# EAGLE board flight-controller (EAGLE 7.4.0)
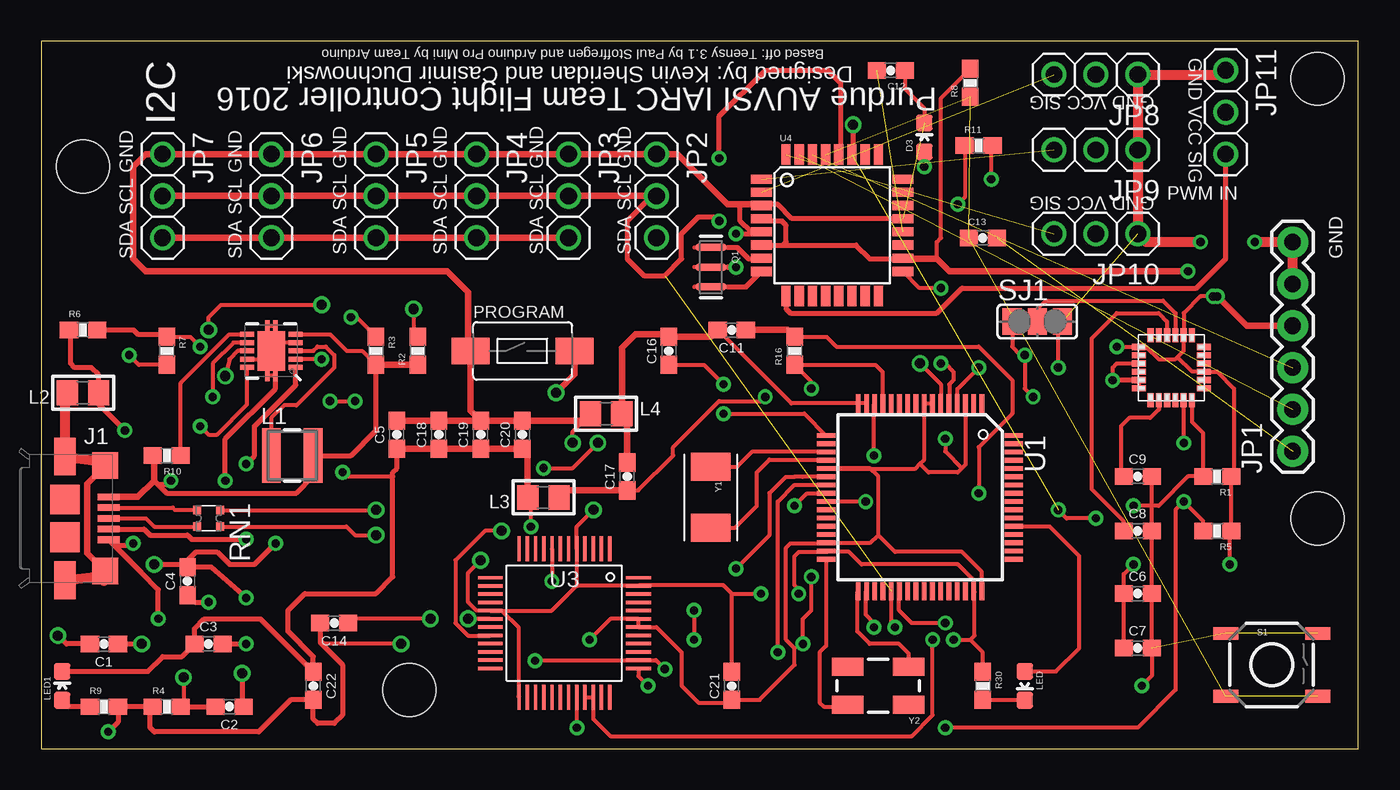
[diagram p0: board, top side]
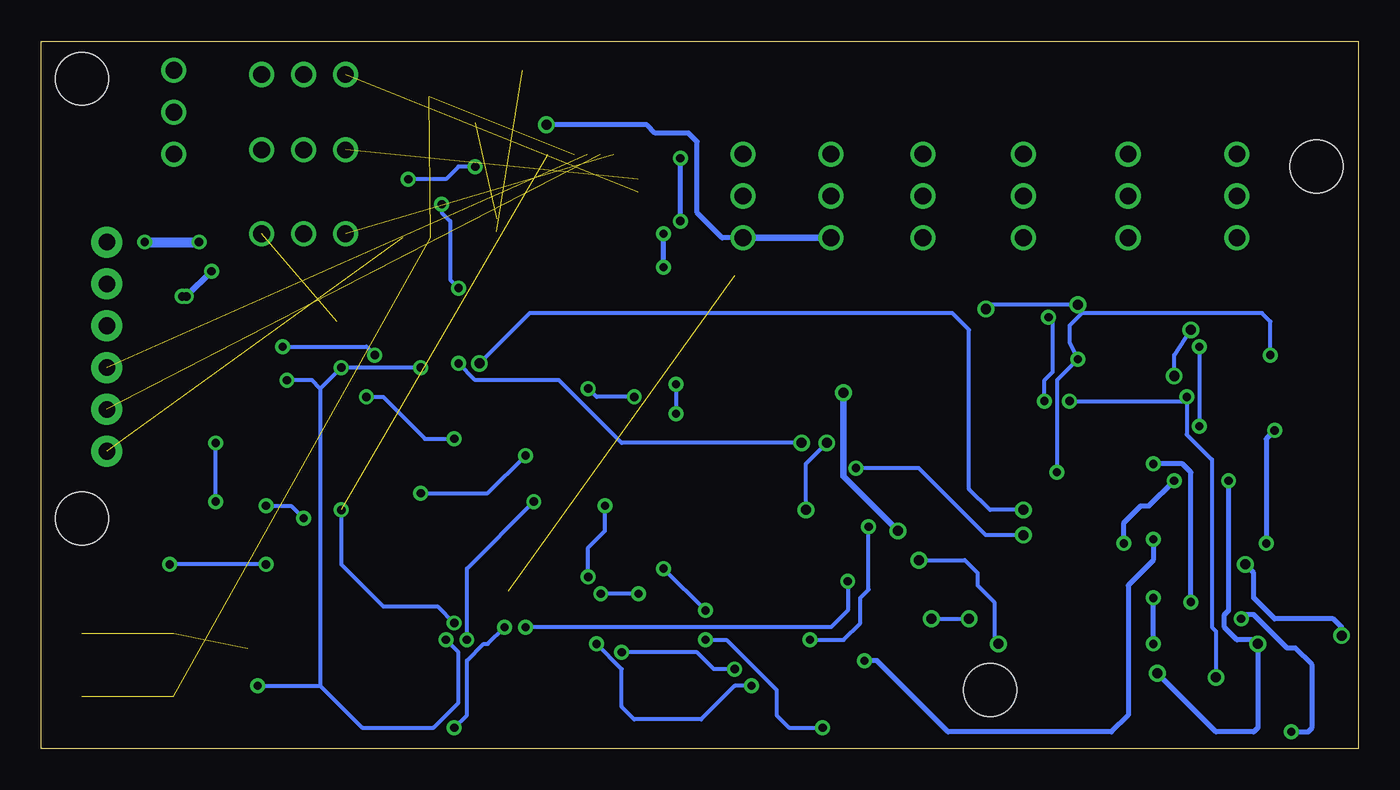
[diagram p1: board, bottom side, seen from below]

Size 79.93 x 42.92 mm. Coordinates in mm from the lower left corner, seen from the top.
Outline: 0,0 79.93,0 79.93,42.92 0,42.92 0,0
Copper layers (1*16): Top 0.035mm / dielectric 1.5mm / Bottom 0.035mm
Design rules "default": minimum track width 10mil, minimum drill 24mil, track to track 8mil, track to pad 8mil, pad to pad 8mil, via to via 8mil, smd to smd 8mil, copper to edge 40mil, drill to drill 8mil, minimum pad ring 10mil, minimum via ring 8mil, stop-mask expansion 4mil, vias tented up to drill 0mil, thermal gap 10mil
Net classes: 1 USB: width 0.254 mm, drill 0.33 mm, clearance 0.159 mm; 2 Top GND Pour: clearance 0.762 mm to class 1
Holes 3.2 mm at 2.54,35.31 77.47,40.64 77.47,13.97 22.35,3.56

## Footprints (pad centres in the part's own frame; a part is rotated, then mirrored left to right if it is on the bottom)
0603-CAP = smd 1.1 x 1: 1 -0.85,0; 2 0.85,0
0603-LED-ALT1 = smd 1 x 1: A 0,-0.877; C 0,0.877
1981584-1 = smd 0.4 x 1.35: 1 -1.3,4.1; 2 -0.65,4.1; 3 0,4.1; 4 0.65,4.1; 5 1.3,4.1 | smd 1.8 x 1.8: M1 -1.15,1.45; M2 1.15,1.45 | smd 2.3 x 1.3: S1 -3.75,1.45; S2 3.75,1.45 | smd 1.6 x 1.6: S3 -3.2,3.885; S4 3.2,3.885
1X06 = drill 1.016 pad 1.88: 1 0,0; 2 2.54,0; 3 5.08,0; 4 7.62,0; 5 10.16,0; 6 12.7,0
1X03 = drill 1.016: 1 -2.54,0; 2 0,0; 3 2.54,0
LPS3015 = smd 1.14 x 3.3: 1 -1.27,0; 2 1.27,0
0805 = smd 1.3 x 1.5: 1 -0.95,0; 2 0.95,0
LED-0603 = smd 1 x 1: A 0,-0.877; C 0,0.877
TACTILE-SWITCH-1101NE = smd 2.3 x 1.6: P$1 -3.15,0; P$2 3.15,0
RESONATOR-SMD-1:1 = smd 0.45 x 1.905: 1 -1.2,0; 2 0,0; 3 1.2,0
0603-RES = smd 1.1 x 1: 1 -0.85,0; 2 0.85,0
EXB34V = smd 0.5 x 0.5: 1 -0.5,-0.7; 2 0.5,-0.7; 3 0.5,0.7; 4 -0.5,0.7
TACTILE-SWITCH-SMD-ALT01 = smd 1.524 x 0.762: 1 -2.794,1.905; 2 2.794,1.905; 3 -2.794,-1.905; 4 2.794,-1.905
SJ_2 = smd 1.168 x 1.6: 1 -1.524,0; 2 0,0; 3 1.524,0
MK20DX256VLH7 = smd 1.1 x 0.285: 1 -5.7,3.75; 2 -5.7,3.25; 3 -5.7,2.75; 4 -5.7,2.25; 5 -5.7,1.75; 6 -5.7,1.25; 7 -5.7,0.75; 8 -5.7,0.25; 9 -5.7,-0.25; 10 -5.7,-0.75; 11 -5.7,-1.25; 12 -5.7,-1.75; 13 -5.7,-2.25; 14 -5.7,-2.75; 15 -5.7,-3.25; 16 -5.7,-3.75; 33 5.7,-3.75; 34 5.7,-3.25; 35 5.7,-2.75; 36 5.7,-2.25; 37 5.7,-1.75; 38 5.7,-1.25; 39 5.7,-0.75; 40 5.7,-0.25; 41 5.7,0.25; 42 5.7,0.75; 43 5.7,1.25; 44 5.7,1.75; 45 5.7,2.25; 46 5.7,2.75; 47 5.7,3.25; 48 5.7,3.75 | smd 0.285 x 1.1: 17 -3.75,-5.7; 18 -3.25,-5.7; 19 -2.75,-5.7; 20 -2.25,-5.7; 21 -1.75,-5.7; 22 -1.25,-5.7; 23 -0.75,-5.7; 24 -0.25,-5.7; 25 0.25,-5.7; 26 0.75,-5.7; 27 1.25,-5.7; 28 1.75,-5.7; 29 2.25,-5.7; 30 2.75,-5.7; 31 3.25,-5.7; 32 3.75,-5.7; 49 3.75,5.7; 50 3.25,5.7; 51 2.75,5.7; 52 2.25,5.7; 53 1.75,5.7; 54 1.25,5.7; 55 0.75,5.7; 56 0.25,5.7; 57 -0.25,5.7; 58 -0.75,5.7; 59 -1.25,5.7; 60 -1.75,5.7; 61 -2.25,5.7; 62 -2.75,5.7; 63 -3.25,5.7; 64 -3.75,5.7
QFN-10_PAD = smd 0.297 x 0.85: 1 -1,-1.475; 2 -0.5,-1.475; 3 0,-1.475; 4 0.5,-1.475; 5 1,-1.475; 6 1,1.475; 7 0.5,1.475; 8 0,1.475; 9 -0.5,1.475; 10 -1,1.475 | smd 0.7 x 0.28: 11 -1.5,0.25; 12 -1.5,-0.25; 13 1.5,0.25; 14 1.5,-0.25 | smd 2.4 x 1.65: 15 0,0
MINI54TAN = smd 0.203 x 1.5: 1 -2.75,-4.5; 2 -2.25,-4.5; 3 -1.75,-4.5; 4 -1.25,-4.5; 5 -0.75,-4.5; 6 -0.25,-4.5; 7 0.25,-4.5; 8 0.75,-4.5; 9 1.25,-4.5; 10 1.75,-4.5; 11 2.25,-4.5; 12 2.75,-4.5; 25 2.75,4.5; 26 2.25,4.5; 27 1.75,4.5; 28 1.25,4.5; 29 0.75,4.5; 30 0.25,4.5; 31 -0.25,4.5; 32 -0.75,4.5; 33 -1.25,4.5; 34 -1.75,4.5; 35 -2.25,4.5; 36 -2.75,4.5 | smd 1.5 x 0.203: 13 4.5,-2.75; 14 4.5,-2.25; 15 4.5,-1.75; 16 4.5,-1.25; 17 4.5,-0.75; 18 4.5,-0.25; 19 4.5,0.25; 20 4.5,0.75; 21 4.5,1.25; 22 4.5,1.75; 23 4.5,2.25; 24 4.5,2.75; 37 -4.5,2.75; 38 -4.5,2.25; 39 -4.5,1.75; 40 -4.5,1.25; 41 -4.5,0.75; 42 -4.5,0.25; 43 -4.5,-0.25; 44 -4.5,-0.75; 45 -4.5,-1.25; 46 -4.5,-1.75; 47 -4.5,-2.25; 48 -4.5,-2.75
TQFP32-08 = smd 1.27 x 0.559: 1 -4.293,2.8; 2 -4.293,2; 3 -4.293,1.2; 4 -4.293,0.4; 5 -4.293,-0.4; 6 -4.293,-1.2; 7 -4.293,-2; 8 -4.293,-2.8; 17 4.293,-2.8; 18 4.293,-2; 19 4.293,-1.2; 20 4.293,-0.4; 21 4.293,0.4; 22 4.293,1.2; 23 4.293,2; 24 4.293,2.8 | smd 0.559 x 1.27: 9 -2.8,-4.293; 10 -2,-4.293; 11 -1.2,-4.293; 12 -0.4,-4.293; 13 0.4,-4.293; 14 1.2,-4.293; 15 2,-4.293; 16 2.8,-4.293; 25 2.8,4.293; 26 2,4.293; 27 1.2,4.293; 28 0.4,4.293; 29 -0.4,4.293; 30 -1.2,4.293; 31 -2,4.293; 32 -2.8,4.293
QFN.24.4X4 = smd 0.85 x 0.38: 1 -1.975,1.25; 2 -1.975,0.75; 3 -1.975,0.25; 4 -1.975,-0.25; 5 -1.975,-0.75; 6 -1.975,-1.25; 13 1.975,-1.25; 14 1.975,-0.75; 15 1.975,-0.25; 16 1.975,0.25; 17 1.975,0.75; 18 1.975,1.25 | smd 0.38 x 0.85: 7 -1.25,-1.975; 8 -0.75,-1.975; 9 -0.25,-1.975; 10 0.25,-1.975; 11 0.75,-1.975; 12 1.25,-1.975; 19 1.25,1.975; 20 0.75,1.975; 21 0.25,1.975; 22 -0.25,1.975; 23 -0.75,1.975; 24 -1.25,1.975
CRYSTAL-TXC-7A = smd 1.7 x 2.4: P$1 1.85,0; P$2 -1.85,0
CRYSTAL-SMD-5X3 = smd 1.9 x 1.1: 1 -1.85,-1.15; 2 1.85,-1.15; 3 1.85,1.15; 4 -1.85,1.15

## Placement (x,y rotation side)
C1  10uF  [0603-CAP]  3.81,6.35 180 top
C2  0.1uF  [0603-CAP]  11.43,2.54 180 top
C3  22uF  [0603-CAP]  10.16,6.35 0 top
C4  0.1uF  [0603-CAP]  8.89,10.16 90 top
C5  0.1uF  [0603-CAP]  21.59,19.05 90 top
C6  0.1uF  [0603-CAP]  66.55,9.4 0 top
C7  10nF  [0603-CAP]  66.55,6.1 0 top
C8  0.1uF  [0603-CAP]  66.55,13.21 0 top
C9  2.2nF  [0603-CAP]  66.55,16.51 0 top
C11  0.1uF  [0603-CAP]  41.91,25.4 180 top
C12  0.1uF  [0603-CAP]  51.56,41.15 180 top
C13  0.1uF  [0603-CAP]  57.15,30.99 0 top
C14  0.1uF  [0603-CAP]  17.78,7.62 180 top
C16  0.1uF  [0603-CAP]  38.1,24.13 90 top
C17  2.2uF  [0603-CAP]  35.56,16.51 90 top
C18  0.1uF  [0603-CAP]  24.13,19.05 90 top
C19  0.1uF  [0603-CAP]  26.67,19.05 90 top
C20  2.2uF  [0603-CAP]  29.21,19.05 90 top
C21  0.1uF  [0603-CAP]  41.91,3.81 90 top
C22  0.1uF  [0603-CAP]  16.51,3.81 270 top
D3  Green  [0603-LED-ALT1]  53.59,37.08 0 top
J1  1981584-1  [1981584-1]  0,13.97 270 top
JP1  FTDI Basic  [1X06]  75.95,18.03 90 top
JP2  [1X03]  37.34,33.53 270 top
JP3  [1X03]  32,33.53 270 top
JP4  [1X03]  26.42,33.53 270 top
JP5  [1X03]  20.32,33.53 270 top
JP6  [1X03]  13.97,33.53 270 top
JP7  [1X03]  7.37,33.53 270 top
JP8  [1X03]  64.01,40.89 180 top
JP9  [1X03]  64.01,36.32 180 top
JP10  [1X03]  64.01,31.24 180 top
JP11  [1X03]  71.88,38.61 270 top
L1  2.2uH, 2.1A  [LPS3015]  15.24,17.78 0 top
L2  600 Ohm/100 Mhz  [0805]  2.54,21.59 180 top
L3  600 Ohm/100 Mhz  [0805]  30.48,15.24 180 top
L4  600 Ohm/100 Mhz  [0805]  34.29,20.32 0 top
LED  AMBER/ 592 nm  [LED-0603]  59.69,3.81 180 top
LED1  [LED-0603]  1.27,3.81 0 top
PROGRAM  Program  [TACTILE-SWITCH-1101NE]  29.21,24.13 0 top
Q1  8/16/20MHz  [RESONATOR-SMD-1:1]  40.64,29.21 270 top
R1  10K  [0603-RES]  71.37,16.51 180 top
R2  10K  [0603-RES]  22.86,24.13 90 top
R3  2M  [0603-RES]  20.32,24.13 270 top
R4  220K  [0603-RES]  7.62,2.54 0 top
R5  10K  [0603-RES]  71.37,13.21 180 top
R6  220K  [0603-RES]  2.54,25.4 0 top
R7  1.2M  [0603-RES]  7.62,24.13 270 top
R8  10K  [0603-RES]  56.39,40.39 90 top
R9  470  [0603-RES]  3.81,2.54 0 top
R10  1K  [0603-RES]  7.62,17.78 180 top
R11  330  [0603-RES]  56.9,36.58 0 top
R16  470  [0603-RES]  45.72,24.13 90 top
R30  470  [0603-RES]  57.15,3.81 270 top
RN1  33  [EXB34V]  10.16,13.97 270 top
S1  Reset  [TACTILE-SWITCH-SMD-ALT01]  74.68,5.08 0 top
SJ1  [SJ_2]  60.45,25.91 0 top
U1  MK20DX256VLH7  [MK20DX256VLH7]  53.34,15.24 270 top
U2  TPS61200  [QFN-10_PAD]  13.97,24.13 90 top
U3  MINI54TAN  [MINI54TAN]  31.75,7.62 180 top
U4  ATMEGA328  [TQFP32-08]  48.01,31.75 0 top
U$1  MPU-9150.QFN  [QFN.24.4X4]  68.58,23.11 180 top
Y1  32.768KHz  [CRYSTAL-TXC-7A]  40.64,15.24 270 top
Y2  16Mhz/8pF  [CRYSTAL-SMD-5X3]  50.8,3.81 180 top

## Library data of the parts
C1 = appfruits; MF: Murata; MPN: GRM188R60J106ME47D
C2 C4-C9 C11 C14 C16 C18 C19 C21 C22 = appfruits; MF: Kemet; MPN: C0603C104J3RACTU
C3 = appfruits; MF: Murata; MPN: GRM188R60J226MEA0D
C12 C13 JP1 R8 R11 U4 = SparkFun
C17 C20 = appfruits; MF: Kemet; MPN: C0603C225K4PACTU
D3 Q1 S1 = Testing
J1 = con-usb; MF: Hirose; MPN: ZX62-AB-5PA(11)
JP2-JP11 = adafruit
L1 = appfruits; MF: Coilcraft; MPN: LPS3015-222MRB
L2-L4 = appfruits; MF: Taiyo Yuden; MPN: BK2125HM601-T
LED = appfruits; MF: Avago Technologies; MPN: HSMA-C190
LED1 = appfruits; MF: Avago; MPN: HSMG-C190
PROGRAM = SparkFun-Electromechanical; MF: C&K Components; MPN: RS-282G05A3-SM RT
R1 R2 R5 = appfruits; MF: Panasonic; MPN: ERJ-3GEYJ103V
R3 = appfruits; MF: Panasonic; MPN: ERJ-3GEYJ205V
R4 R6 = appfruits; MF: Panasonic; MPN: ERJ-3GEYJ224V
R7 = appfruits; MF: Panasonic; MPN: ERJ-3GEYJ125V
R9 R16 R30 = appfruits; MF: Panasonic; MPN: ERJ-3GEYJ471V
R10 = appfruits; MF: Panasonic; MPN: ERJ-3GEYJ102V
RN1 = resistor-dil; MF: Panasonic; MPN: EXB-34V330JV; OC_FARNELL: unknown; OC_NEWARK: unknown
SJ1 = jumper
U1 = appfruits; MF: Freescale; MPN: MK20DX256VLH7
U2 = appfruits; MF: Texas Instruments; MPN: TPS61200DRCR; PROD_ID: IC-10035
U3 = TeensyCustom
U$1 = invensense
Y1 = appfruits; MF: Epson Timing; MPN: FC-255 32.7680K-A3
Y2 = appfruits; MF: ECS; MPN: ECS-160-8-30B-CKM

## Nets
3.3V: C3.1 C5.1 C6.1 C7.1 C18.1 C19.1 C20.1 C21.1 C22.1 JP1.4 L3.2 LED1.C R1.1 R5.1 R7.2 R8.2 SJ1.1 U1.3 U1.7 U1.8 U1.21 U1.30 U1.48 U2.2 U3.42 U3.43 U4.4 U4.6 U4.18 U$1.3 U$1.8 U$1.13
AREF: C12.2 U4.20
DTR: C13.2 JP1.1
FB: R6.2 R7.1 U2.10
GND [Top GND Pour]: C5.2 C6.2 C7.2 C8.2 C9.2 C12.1 C14.2 C18.2 C19.2 C20.2 C21.2 C22.2 D3.C J1.5 JP1.5 JP1.6 JP2.1 JP3.1 JP4.1 JP5.1 JP6.1 JP7.1 JP8.1 JP9.1 JP10.1 JP11.1 L2.1 L4.1 PROGRAM.P$1 Q1.2 R4.1 R6.1 R9.2 R30.1 S1.1 S1.2 SJ1.3 U1.4 U1.31 U1.47 U3.5 U3.17 U3.25 U3.47 U4.3 U4.5 U4.21 U$1.15 U$1.17 U$1.18
ID: J1.4 U1.23 U3.38
MISO: U1.52
MOSI: U1.51
N$1: LED1.A R9.1
N$2: L1.1 U2.3
N$3: C9.1 U$1.20
N$4: C8.1 U$1.10
N$5: SJ1.2 U$1.9
N$6: Q1.3 U4.8
N$7: D3.A R11.2
N$8: Q1.1 U4.7
N$9: JP1.3 U4.30
N$10: JP1.2 U4.31
N$11: JP10.3 U4.32
N$12: LED.A U1.53
N$13: JP9.3 U4.1
N$14: JP8.3 U4.2
N$15: U1.24 U3.37
N$16: JP11.3 U4.9
N$18: LED.C R30.2
N$19: PROGRAM.P$2 U3.20
N$22: C14.1 U3.18
N$27: U1.32 Y2.3
N$28: U1.33 Y2.1
N$29: U1.19 Y1.P$2
N$30: U1.20 Y1.P$1
NONE: R11.1 U4.17
PGND: C1.2 C3.2 C4.2 U2.4 U2.9 U2.11 U2.12 U2.13 U2.14 U2.15
PS: R2.2 U2.8
RESET: C13.1 R8.1 S1.3 S1.4 U4.29
RESET_B: U1.34 U3.8
SCK: U1.50
SCL: JP2.2 JP3.2 JP4.2 JP5.2 JP6.2 JP7.2 R5.2 U1.37 U4.28 U$1.23
SDA: JP2.3 JP3.3 JP4.3 JP5.3 JP6.3 JP7.3 R1.2 U1.38 U4.27 U$1.24
SOFTPOWER: R10.1 U2.6
SWD_CLK: U1.22 U3.32
SWD_DIO: U1.25 U3.33 U3.34
USB_CON_N [USB]: J1.2 RN1.1
USB_CON_P [USB]: J1.3 RN1.2
USB_D_N [USB]: RN1.4 U1.6
USB_D_P [USB]: RN1.3 U1.5
USB_SHIELD: J1.S1 J1.S2 J1.S3 J1.S4 L2.2
UVLO: C2.2 R3.1 R4.2 U2.7
VAUX: C4.1 U2.1
VCC: C1.1 C2.1 J1.1 L1.2 R2.1 R3.2 R10.2 U2.5
VDDA: C17.1 L3.1 R16.1 U1.13
VREF_OUT: C16.1 U1.17
VREFH: C11.1 R16.2 U1.14
VREFL: C11.2 C16.2 C17.2 L4.2 U1.15 U1.16

## Tracks (layer width: path | path; a pad name or v marks a point on that pad's centre or on a via)
3.3V  (via drill 0.5)
  Top 0.254: R7.2 5.93,23.28 v5.33,23.88 | v17.02,23.62 U2.2 | v18.29,16.76 18.54,16.51 21.34,16.51 | v33.27,6.6 34.54,7.87 U3.43 U3.42 37.33,7.37 38.86,5.84 38.86,3.81 39.88,2.79 41.74,2.79 C21.1 43.6,2.96 45.72,5.08 45.72,6.1 45.21,6.6 45.21,12.19 45.47,12.45 47.6,12.45 U1.30 50.34,12.49 50.8,12.95 | v29.72,13.46 29.72,15.05 L3.2 | 50.8,12.95 50.8,16.51 50.29,17.02 47.67,17.02 U1.21 53.06,16.99 53.34,17.27 | 53.34,17.27 53.59,17.53 U1.8 U1.7 | U1.3 56.09,17.23 55.88,17.02 | 55.88,17.02 55.63,16.76 53.85,16.76 53.34,17.27 | U1.48 57.09,10.73 55.88,11.94 51.82,11.94 50.8,12.95 | C7.1 C6.1 65.7,10.58 v66.29,11.18 | v72.14,11.18 72.14,13.12 R5.1 R1.1 72.39,16.68 72.39,21.84 71.37,22.86 U$1.3 69.85,22.86 68.96,23.75 | 68.96,23.75 68.83,23.62 67.82,23.62 67.08,24.36 U$1.13 65.3,24.36 v65.28,24.38 | 68.96,23.75 69.34,24.13 69.34,25.08 U$1.8 69.34,25.1 69.34,26.42 70.36,27.43 v71.12,27.43 | v59.69,23.88 59.44,23.88 | 59.44,23.88 58.93,24.38 SJ1.1 | 59.44,23.88 59.69,23.62 v59.69,23.88 | v59.69,23.88 59.69,21.84 v60.2,21.34 | v54.86,18.8 54.86,18.03 55.88,17.02 | 54.36,29.72 54.36,30.73 54.61,30.99 54.61,39.46 R8.2
  Top 0.305: LED1.C 6.46,4.69 7.37,5.59 8.55,5.59 C3.1 9.31,7.28 9.91,7.87 13.3,7.87 C22.1 16.51,5.59 14.99,7.11 14.99,8.38 16,9.4 20.32,9.4 21.34,10.41 21.34,16.51 21.34,16.76 21.59,17.02 C5.1 | U4.4 43.86,32 44.96,32 45.21,31.75 45.21,30.73 45.03,30.55 U4.6 49.46,30.55 50.29,29.72 52.27,29.72 U4.18
  Top 0.406: C5.1 C18.1 C19.1 C20.1 29.53,17.88 L3.2 | JP1.4 73.15,25.65 v71.37,27.43 | v69.6,28.96 55.12,28.96 54.36,29.72 52.33,29.72 U4.18
  Bottom 0.254: v5.33,23.88 5.33,25.91 5.84,26.42 16.76,26.42 17.53,25.65 17.53,24.64 v17.02,23.62 18.29,22.35 v18.29,16.76 | v33.27,6.6 31.24,6.6 30.23,7.62 30.23,9.14 29.72,9.65 v29.72,13.46 | v66.29,11.18 v72.14,11.18 | v65.28,24.38 60.2,24.38 v59.69,23.88 | v60.2,21.34 59.18,21.34 56.64,18.8 v54.86,18.8
  Bottom 0.406: v71.37,27.43 v71.12,27.43 v69.6,28.96
AREF  (1 unrouted)
DTR  (1 unrouted)
FB  (via drill 0.5)
  Top 0.254: R7.1 9.06,24.98 v9.65,24.38 | 12.48,23.11 U2.10 12.49,20.88 10.67,19.05 10.16,19.05 v9.65,19.56
  Top 0.305: R6.2 5.59,25.4 5.84,25.15 7.45,25.15 R7.1
  Bottom 0.254: v9.65,24.38 v9.65,19.56
GND  (via drill 0.5, 0.61)  (4 unrouted)
  Top 0.254: U3.17 30.98,8.37 32.51,9.91 | 32.51,9.91 32.51,12.11 U3.5 32.5,13.45 v33.53,14.48 | U3.17 27.95,8.37 28.96,7.37 28.96,3.16 U3.25 | U3.17 26.43,8.37 25.91,8.89 25.91,10.67 v26.67,11.43 | v21.84,6.35 17.18,6.35 16.93,6.6 | v32.26,18.54 32.26,19.24 L4.1 | 32.51,9.91 32.55,9.87 U3.47 36.29,9.91 41.4,9.91 41.91,9.4 | C21.2 41.91,9.4 | 41.91,9.4 v43.69,9.4 | v45.97,9.4 45.97,9.65 45.72,9.91 45.72,11.68 45.97,11.94 47.59,11.94 U1.31 47.69,11.94 49.02,11.94 49.78,11.18 55.63,11.18 56.59,10.21 U1.47 56.64,9.49 56.64,6.86 56.39,6.6 | U1.4 55.59,21.81 v56.9,23.11 | v55.37,6.6 56.39,6.6 | R30.1 57.15,5.84 56.39,6.6 | v66.8,3.81 67.4,4.41 C7.2 C6.2 C8.2 C9.2 | v61.72,23.11 61.72,25.65 SJ1.3 | v65.02,22.35 66.59,22.35 U$1.17 | U$1.17 U$1.18 | U$1.17 65.04,22.36 v65.02,22.35 | v65.02,22.35 65.02,23.11 65.28,23.37 U$1.15 | C12.1 52.41,40.04 53.59,38.86 D3.C
  Top 0.305: R6.1 1.78,25.31 1.78,23.37 2.03,23.11 3.05,23.11 3.49,22.67 L2.1 3.49,20.89 v5.08,19.3 | C14.2 16.93,6.6 16.93,6.44 18.29,5.08 18.29,2.03 17.78,1.52 16.76,1.52 16.51,1.78 C22.2 15.15,2.96 13.21,1.02 6.86,1.02 6.6,1.27 6.6,2.37 R4.1 R9.2 4.66,1.61 v4.06,1.02 | v7.11,7.87 7.11,9.65 6.1,10.67 4.45,12.32 | 4.45,12.32 J1.5 | v5.59,12.45 5.46,12.32 4.45,12.32 | 41.66,29.21 v42.16,29.21 | v42.16,31.24 43.6,31.24 U4.5 43.07,31.35 42.42,32 42.42,33.02 | U4.21 45.57,32.15 44.7,33.02 43.78,33.02 U4.3
  Top 0.406: C5.2 C18.2 C19.2 | C19.2 C20.2 32.92,19.9 L4.1 | C19.2 26.06,20.51 PROGRAM.P$1 25.91,24.28 25.91,27.69 24.64,28.96 6.35,28.96 5.59,29.72 5.59,35.31 6.35,36.07 JP7.1 | JP7.1 JP6.1 JP5.1 JP4.1 JP3.1 JP2.1 | JP2.1 JP7.1 | JP2.1 38.61,36.07 41.66,33.02 42.42,33.02 43.64,33.02 U4.3
  Top 0.61: JP11.1 71.63,40.89 JP8.1 JP9.1 JP10.1 67.06,30.73 v70.36,30.73 | JP1.5 JP1.6 v73.66,30.73
  Bottom 0.254: v26.67,11.43 23.88,11.43 23.11,10.67 23.11,9.91 22.1,8.89 22.1,6.6 v21.84,6.35 | v33.53,14.48 33.53,17.27 v32.26,18.54 | v43.69,9.4 v45.97,9.4 | v56.9,23.11 v61.72,23.11 62.99,21.84 | 62.99,21.84 62.99,3.81 | 62.99,3.81 60.45,1.27 56.13,1.27 54.61,2.79 54.61,5.84 v55.37,6.6 | v66.8,3.81 62.99,3.81 | 62.99,21.84 63.5,22.35 v65.02,22.35
  Bottom 0.305: v4.06,1.02 3.05,1.02 2.79,1.27 2.79,5.08 3.81,6.1 4.32,6.1 6.35,8.13 6.86,8.13 v7.11,7.87 | v5.08,19.3 5.59,18.8 v5.59,12.45 | v42.16,29.21 v42.16,31.24
  Bottom 0.61: v73.66,30.73 v70.36,30.73
ID  (via drill 0.5)
  Top 0.254: v29.97,5.33 30.01,5.37 U3.38 37.3,5.37 v37.85,4.83 | v44.7,5.84 44.7,14.99 45.72,16 47.63,16 U1.23
  Top 0.305: J1.4 6.24,13.32 6.6,12.95 8.89,12.95 9.14,12.7 v12.45,12.7
  Bottom 0.254: v37.85,4.83 39.12,4.83 40.13,5.84 v44.7,5.84
  Bottom 0.305: v12.45,12.7 12.45,11.43 13.97,9.91 13.97,2.03 14.99,1.02 24.89,1.02 29.21,5.33 v29.97,5.33
N$1
  Top 0.305: R9.1 1.66,2.54 LED1.A
N$2
  Top 0.254: U2.3 16.51,24.13 16.76,24.38 17.27,24.38 17.78,23.88 17.78,23.11 15.49,20.83 14.73,20.83 13.97,20.07 L1.1
N$3
  Top 0.254: U$1.20 67.83,20.59 67.31,20.07 66.04,20.07 65.53,19.56 65.53,16.68 C9.1
N$4
  Top 0.254: C8.1 65.7,13.8 63.75,15.75 63.75,24.89 65.28,26.42 67.82,26.42 68.33,25.91 U$1.10
N$5
  Top 0.254: SJ1.2 60.45,26.67 60.96,27.18 68.07,27.18 68.83,26.42 U$1.9
N$6
  Top 0.305: 41.66,28.01 42.77,28.01 U4.8
N$7  (via drill 0.5)
  Top 0.254: D3.A v53.59,35.31 | v57.66,34.54 57.66,36.49 R11.2
  Bottom 0.254: v53.59,35.31 54.61,35.31 55.37,34.54 v57.66,34.54
N$8
  Top 0.305: 41.66,30.41 42.23,30.41 42.93,29.72 43.68,29.72 U4.7
N$9  (1 unrouted)
N$10  (1 unrouted)
N$11  (1 unrouted)
N$12
  Top 0.254: LED.A 61.58,4.69 62.99,6.1 62.99,11.68 61.21,13.46 59.07,13.46 U1.53
N$13  (1 unrouted)
N$14  (1 unrouted)
N$15  (via drill 0.5)
  Top 0.254: U3.37 36.25,4.39 v36.83,3.81 | v46.23,6.35 46.23,7.87 46.74,8.38 v46.74,10.41 | v45.72,14.73 46.48,15.49 U1.24
  Bottom 0.254: v36.83,3.81 37.85,3.81 39.88,1.78 43.94,1.78 44.7,2.54 44.7,4.83 v46.23,6.35 | v46.74,10.41 46.74,12.19 45.72,13.21 v45.72,14.73
N$16
  Top 0.305: U4.9 45.21,26.68 45.47,26.42 54.36,26.42 55.88,27.94 70.1,27.94 71.88,29.72 JP11.3
N$18
  Top 0.254: R30.2 59.66,2.96 LED.C
N$19  (via drill 0.61)
  Top 0.254: v27.94,13.21 26.92,13.21 25.15,11.43 25.15,7.62 25.91,6.86 27.24,6.86 U3.20
  Top 0.406: PROGRAM.P$2 32.36,22.71 v31.24,21.59
  Bottom 0.406: v31.24,21.59 31.24,16.51 v27.94,13.21
N$22  (via drill 0.61)
  Top 0.254: U3.18 v25.91,7.87 | v23.62,7.87 18.88,7.87 C14.1
  Bottom 0.254: v25.91,7.87 v23.62,7.87
N$27
  Top 0.254: U1.32 47.64,6.24 47.24,5.84 47.24,2.79 47.5,2.54 48.83,2.54 Y2.3
N$28
  Top 0.254: Y2.1 52.65,5.77 52.07,6.35 50.29,6.35 49.53,7.11 49.53,9.48 U1.33
N$29
  Top 0.254: Y1.P$2 42.24,17.09 43.18,18.03 47.6,18.03 U1.19
N$30
  Top 0.254: Y1.P$1 42.09,13.39 43.43,14.73 43.43,16.76 44.2,17.53 47.6,17.53 U1.20
NONE  (via drill 0.5)
  Top 0.254: R11.1 56.05,33.44 v55.63,33.02 | v54.61,27.94 53.31,27.94 U4.17
  Bottom 0.254: v55.63,33.02 55.63,32.51 55.12,32 55.12,28.45 v54.61,27.94
PGND  (via drill 0.5, 0.61)
  Top 0.254: U2.4 14.47,24.63 U2.15 | U2.14 U2.13 13.72,24.38 U2.15 | U2.15 14.22,23.88 U2.12 U2.11 | U2.9 13.47,23.63 U2.15
  Top 0.305: C1.2 1.52,6.35 v1.02,6.86 | v6.86,11.18 8.72,11.18 C4.2 | C3.2 v12.45,6.35 | v12.45,9.14 10.33,11.01 C4.2 | C4.2 8.89,11.43 9.4,11.94 10.67,11.94 11.43,11.18 12.95,11.18 v14.22,12.45 | v11.18,16.26 11.18,18.8 14.22,21.84 U2.12
  Bottom 0.305: v1.02,6.86 1.02,7.37 1.52,7.87 5.08,7.87 6.35,9.14 6.35,10.67 v6.86,11.18 | v12.45,6.35 v12.45,9.14 | v14.22,12.45 14.22,13.72 13.21,14.73 12.7,14.73 v11.18,16.26
PS  (via drill 0.61)
  Top 0.254: U2.8 11.94,24.13 11.43,23.62 v11.18,22.61 | v10.16,25.4 10.16,26.16 10.92,26.92 v17.02,26.92 | v22.61,26.67 22.61,25.23 R2.2
  Bottom 0.254: v11.18,22.61 11.18,23.88 v10.16,25.4 | v17.02,26.92 22.35,26.92 v22.61,26.67
RESET  (4 unrouted)
RESET_B  (via drill 0.5)
  Top 0.254: U3.8 31,10.17 v30.99,10.16 | v50.55,7.37 50.55,7.62 50.04,8.13 50.04,9.49 U1.34
  Bottom 0.254: v30.99,10.16 30.99,8.38 32,7.37 v50.55,7.37
SCL  (via drill 0.5)  (1 unrouted)
  Top 0.254: R5.2 70.52,13.8 v69.34,14.99 68.83,14.48 68.83,3.56 66.55,1.27 v54.86,1.27 | v69.34,18.54 69.34,21.13 U$1.23 | v51.82,7.37 51.59,7.59 U1.37
  Top 0.305: JP2.2 37.08,33.53 35.56,32 35.56,29.72 36.58,28.7 37.85,28.7 38.86,29.72 38.86,31.24 39.88,32.26 40.89,32.26 v41.15,32 | v41.15,35.81 41.15,38.35 43.94,41.15 47.75,41.15 48.51,40.39 48.51,36.15 U4.28
  Top 0.406: JP7.2 JP6.2 JP5.2 JP4.2 JP3.2 JP2.2
  Bottom 0.254: v69.34,14.99 v69.34,18.54 | v54.86,1.27 54.1,2.03 54.1,5.33 53.09,6.35 52.83,6.35 v51.82,7.37
  Bottom 0.305: v41.15,32 v41.15,35.81
SDA  (via drill 0.5, 0.6)  (1 unrouted)
  Top 0.254: U$1.24 69.85,21.12 69.85,19.81 70.52,19.14 R1.2 69.6,16.51 67.82,14.73 v66.29,14.73 | v64.01,13.97 62.23,13.97 v61.72,14.48 | v54.86,7.62 52.83,7.62 52.07,8.38 52.07,9.52 U1.38
  Top 0.305: v49.28,37.85 49.28,36.11 U4.27
  Top 0.406: JP7.3 JP6.3 JP5.3 JP4.3 JP3.3
  Bottom 0.254: v66.29,14.73 64.77,14.73 v64.01,13.97 | v61.72,14.48 61.72,11.18 59.18,8.64 55.88,8.64 v54.86,7.62
  Bottom 0.305: JP2.3 38.61,30.99 40.13,32.51 40.13,36.83 40.64,37.34 42.67,37.34 43.18,37.85 v49.28,37.85
  Bottom 0.406: JP3.3 JP2.3
SOFTPOWER
  Top 0.254: R10.1 8.47,22.19 11.41,25.13 U2.6
SWD_CLK  (via drill 0.5)
  Top 0.254: U1.22 46.23,16.49 45.7,16.49 45.19,16.49 44.2,15.49 44.2,12.95 v42.16,10.92 | v39.62,8.38 v39.62,6.6 | v32.51,1.27 32.51,3.11 U3.32
  Bottom 0.254: v42.16,10.92 v39.62,8.38 | v39.62,6.6 38.35,6.6 35.31,3.56 35.31,2.03 34.54,1.27 v32.51,1.27
SWD_DIO  (via drill 0.5)
  Top 0.254: U3.33 U3.34 33.5,1.81 34.54,0.76 52.83,0.76 54.1,2.03 v54.1,6.6 | v50.04,14.99 U1.25
  Bottom 0.254: v54.1,6.6 54.1,10.92 v50.04,14.99
USB_CON_N
  Top 0.254: J1.2 7.99,14.62 8.13,14.48 RN1.1
USB_CON_P
  Top 0.254: J1.3 6.35,13.97 6.86,13.46 RN1.2
USB_D_N  (via drill 0.61)
  Top 0.254: RN1.4 v20.31,14.47 v20.32,14.48 | v53.34,23.37 54.59,22.12 U1.6
  Bottom 0.254: v20.32,14.48 22.35,14.48 23.62,15.75 23.62,25.4 24.64,26.42 50.29,26.42 v53.34,23.37
USB_D_P  (via drill 0.5, 0.61)
  Top 0.254: v33.78,18.54 32.26,17.02 v30.48,17.02 | v54.61,23.37 54.86,23.37 55.37,22.86 55.37,22.35 55.12,22.1 55.12,20.97 U1.5 | RN1.3 18.53,13.47 19.05,12.95 v20.32,12.95
  Bottom 0.254: v33.78,18.54 44.7,18.54 48.51,22.35 53.59,22.35 v54.61,23.37 | v20.32,12.95 22.61,12.95 26.67,17.02 v30.48,17.02
USB_SHIELD
  Top 0.305: 1.27,21.59 L2.2 | 3.81,10.16 3.81,10.7 J1.S4
  Top 0.406: J1.S4 2.79,11.86 2.79,16.08 J1.S3
  Top 0.61: 1.27,21.59 1.45,21.16 J1.S1 3.33,17.47 J1.S3 | J1.S2 3.75,10.47 3.81,10.16
UVLO  (via drill 0.5, 0.61)
  Top 0.254: U2.7 11.68,24.63 10.41,23.37 v10.41,21.34 | v8.64,4.32 8.64,2.71 R4.2 | v17.53,21.08 v19.05,21.08 | v18.8,26.16 19.14,26.16 R3.1
  Top 0.305: R4.2 C2.2
  Bottom 0.254: v17.53,21.08 10.67,21.08 v10.41,21.34 10.41,19.05 8.89,17.53 8.89,7.37 8.64,7.11 v8.64,4.32 | v19.05,21.08 19.05,22.35 18.54,22.86 18.54,25.91 v18.8,26.16
VAUX  (via drill 0.5)
  Top 0.305: C4.1 9.31,8.89 v10.16,8.89 | v12.45,17.27 12.95,17.78 12.95,19.56 15.45,22.05 U2.1
  Bottom 0.305: v10.16,8.89 10.16,16.76 10.67,17.27 v12.45,17.27
VCC  (via drill 0.5, 0.61)
  Top 0.254: U2.5 17.54,25.13 18.54,24.13 19.47,24.13 R3.2
  Top 0.305: R3.2 20.32,19.3 18.8,17.78 L1.2 16.51,16.51 15.49,15.49 7.62,15.49 7.11,16 | 6.86,16.26 7.11,16 | C1.1 v6.1,6.35 | v12.19,4.57 12.19,2.63 C2.1 | v7.87,16.26 7.62,16 7.11,16
  Top 0.406: J1.1 5.87,15.27 6.86,16.26 6.86,17.69 R10.2 | R3.2 R2.1
  Bottom 0.305: v12.19,4.57 8.64,1.02 6.35,1.02 6.1,1.27 v6.1,6.35 6.35,6.6 7.37,6.6 8.13,7.37 8.13,8.13 7.87,8.38 v7.87,16.26
VDDA  (via drill 0.5)
  Top 0.254: U1.13 51.05,20.98 51.05,22.86 50.63,23.28 R16.1 46.74,22.26 v46.74,21.84 | C17.1 36.23,15.66 38.35,17.78 38.35,18.29 41.15,21.08 43.69,21.08 v43.94,21.34
  Top 0.406: L3.1 31.85,15.66 C17.1
  Bottom 0.254: v43.94,21.34 46.23,21.34 v46.74,21.84
VREF_OUT  (via drill 0.5)
  Top 0.254: C16.1 40.22,23.28 v41.4,22.1 | v41.4,20.32 46.31,20.32 U1.17
  Bottom 0.254: v41.4,22.1 v41.4,20.32
VREFH  (via drill 0.5)
  Top 0.254: R16.2 47.66,24.98 48.26,24.38 56.9,24.38 58.93,22.35 58.93,20.32 56.9,18.29 v56.9,15.49 | v50.55,17.78 50.55,20.9 U1.14
  Top 0.406: C11.1 45.3,25.4 R16.2
  Bottom 0.254: v56.9,15.49 52.83,15.49 v50.55,17.78
VREFL
  Top 0.254: U1.15 U1.16 45.52,20.94 C11.2
  Top 0.406: C17.2 35.56,20 L4.2 35.24,24.32 36.07,25.15 37.93,25.15 C16.2 40.64,24.98 C11.2

## Text on the board
tSilk: GND VCC SIG | GND VCC SIG | I2C | GND VCC SIG | PWM IN | SDA SCL GND | SDA SCL GND | SDA SCL GND | SDA SCL GND | SDA SCL GND | SDA SCL GND | GND
_tsilk: Based off: Teensy 3.1 by Paul Stoffregen and Arduino Pro Mini by Team Arduino | Designed by: Kevin Sheridan and Casimir Duchnowski | Purdue AUVSI IARC Team Flight Controller 2016